# EAGLE board LoRa_kirendezo (EAGLE 9.7.0)
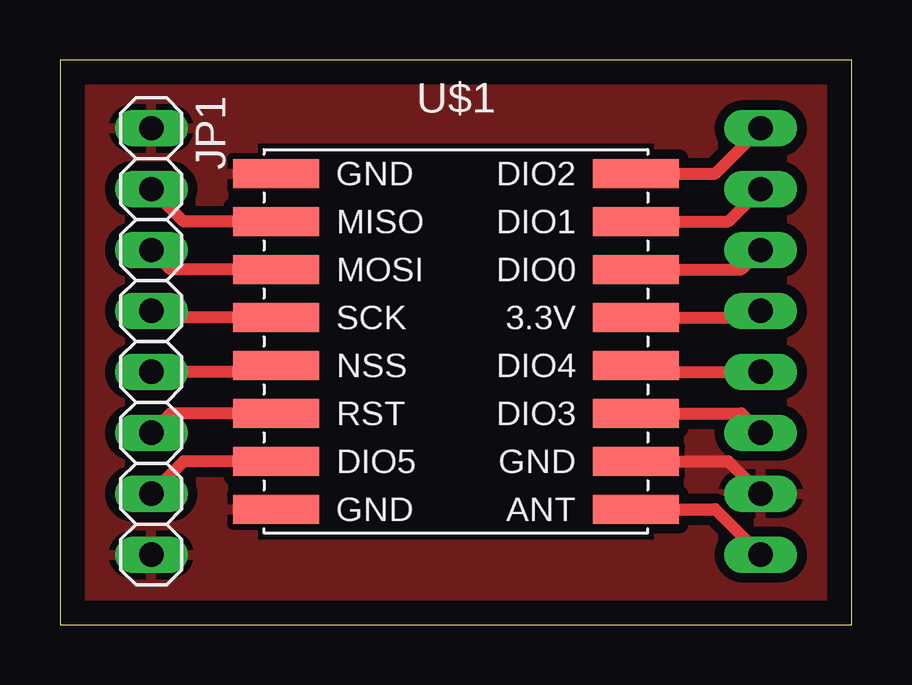
[diagram p0: board, top side]
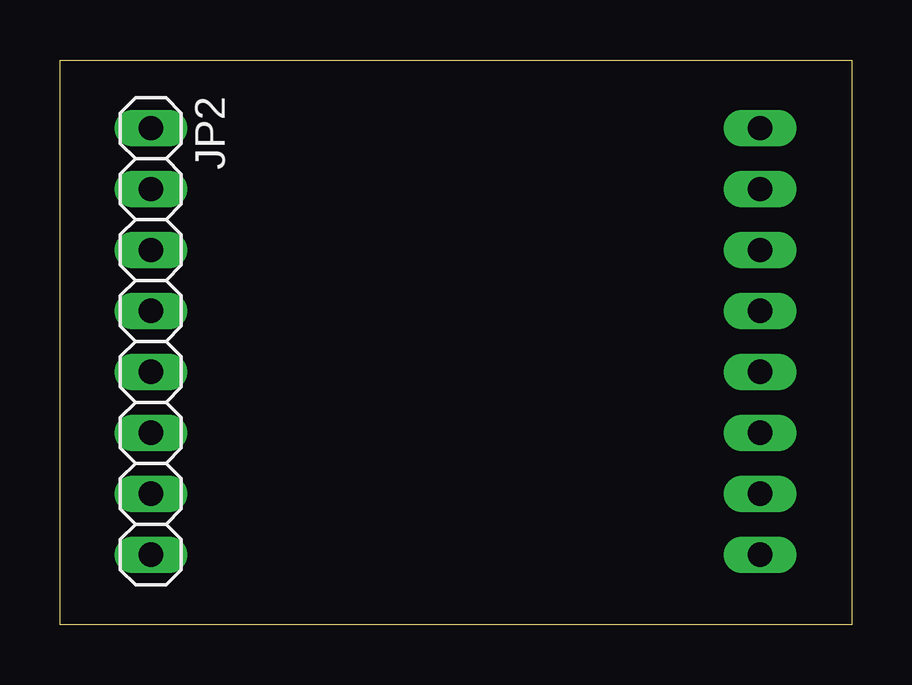
[diagram p1: board, bottom side, seen from below]

Size 33 x 23.55 mm. Coordinates in mm from the lower left corner, seen from the top.
Outline: 0,0 33,0 33,23.55 0,23.55 0,0
Copper layers (1*16): Top 0.035mm / dielectric 1.5mm / Bottom 0.035mm
Design rules "default": minimum track width 6mil, minimum drill 0.35mm, track to track 6mil, track to pad 6mil, pad to pad 6mil, via to via 6mil, smd to smd 6mil, copper to edge 40mil, drill to drill 6mil, minimum pad ring 10mil, minimum via ring 8mil, stop-mask expansion 4mil, vias tented up to drill 0mil, thermal gap 10mil

## Footprints (pad centres in the part's own frame; a part is rotated, then mirrored left to right if it is on the bottom)
1X08 = drill 1.016 long: 1 -8.89,0; 2 -6.35,0; 3 -3.81,0; 4 -1.27,0; 5 1.27,0; 6 3.81,0; 7 6.35,0; 8 8.89,0
WIRELESS-LORA-RFM95W#SMD = smd 3.6 x 1.2: A1 -7.5,7; A2 -7.5,5; A3 -7.5,3; A4 -7.5,1; A5 -7.5,-1; A6 -7.5,-3; A7 -7.5,-5; A8 -7.5,-7; B1 7.5,7; B2 7.5,5; B3 7.5,3; B4 7.5,1; B5 7.5,-1; B6 7.5,-3; B7 7.5,-5; B8 7.5,-7

## Placement (x,y rotation side)
JP1  [1X08]  3.81,11.81 270 top
JP2  [1X08]  29.21,11.81 270 bottom
U$1  WIRELESS-LORA-RFM95W#SMD  [WIRELESS-LORA-RFM95W#SMD]  16.51,11.81 0 top

## Library data of the parts
JP1 JP2 = Connector; CATEGORY: CONNECTOR; SUB-CATEGORY: PIN-HEADER
U$1 = diy-modules

## Nets
GND: JP1.1 JP1.8 JP2.7 U$1.A1 U$1.A8 U$1.B7
N$2: JP1.2 U$1.A2
N$3: JP1.3 U$1.A3
N$4: JP1.4 U$1.A4
N$5: JP1.5 U$1.A5
N$6: JP1.6 U$1.A6
N$7: JP1.7 U$1.A7
N$9: JP2.8 U$1.B8
N$11: JP2.6 U$1.B6
N$12: JP2.5 U$1.B5
N$13: JP2.4 U$1.B4
N$14: JP2.3 U$1.B3
N$15: JP2.2 U$1.B2
N$16: JP2.1 U$1.B1

## Tracks (layer width: path | path; a pad name or v marks a point on that pad's centre or on a via)
GND
  Top 0.508: U$1.B7 27.86,6.81 JP2.7
  pour Top (isolate 0.406): -0.13,-0.25 -0.13,23.62 33.15,23.62 33.15,-0.25
N$2
  Top 0.508: U$1.A2 5.16,16.81 JP1.2
N$3
  Top 0.508: U$1.A3 4.62,14.81 JP1.3
N$4
  Top 0.508: 8.74,13.08 U$1.A4 4.08,12.81 JP1.4
N$5
  Top 0.508: U$1.A5 8.74,10.54 JP1.5
N$6
  Top 0.508: U$1.A6 4.62,8.81 JP1.6
N$7
  Top 0.508: U$1.A7 5.16,6.81 JP1.7
N$9
  Top 0.508: U$1.B8 27.32,4.81 JP2.8
N$11
  Top 0.508: U$1.B6 28.4,8.81 JP2.6
N$12
  Top 0.508: U$1.B5 24.28,10.54 JP2.5
N$13
  Top 0.508: U$1.B4 28.94,12.81 JP2.4
N$14
  Top 0.508: U$1.B3 28.4,14.81 JP2.3
N$15
  Top 0.508: U$1.B2 27.86,16.81 JP2.2
N$16
  Top 0.508: U$1.B1 27.32,18.81 JP2.1
N_GND
  cutout Top: 8.26,20.07 24.77,20.07 24.77,3.56 8.26,3.56